# Allegro board solutionstida01606_powercard_29FEB.brd
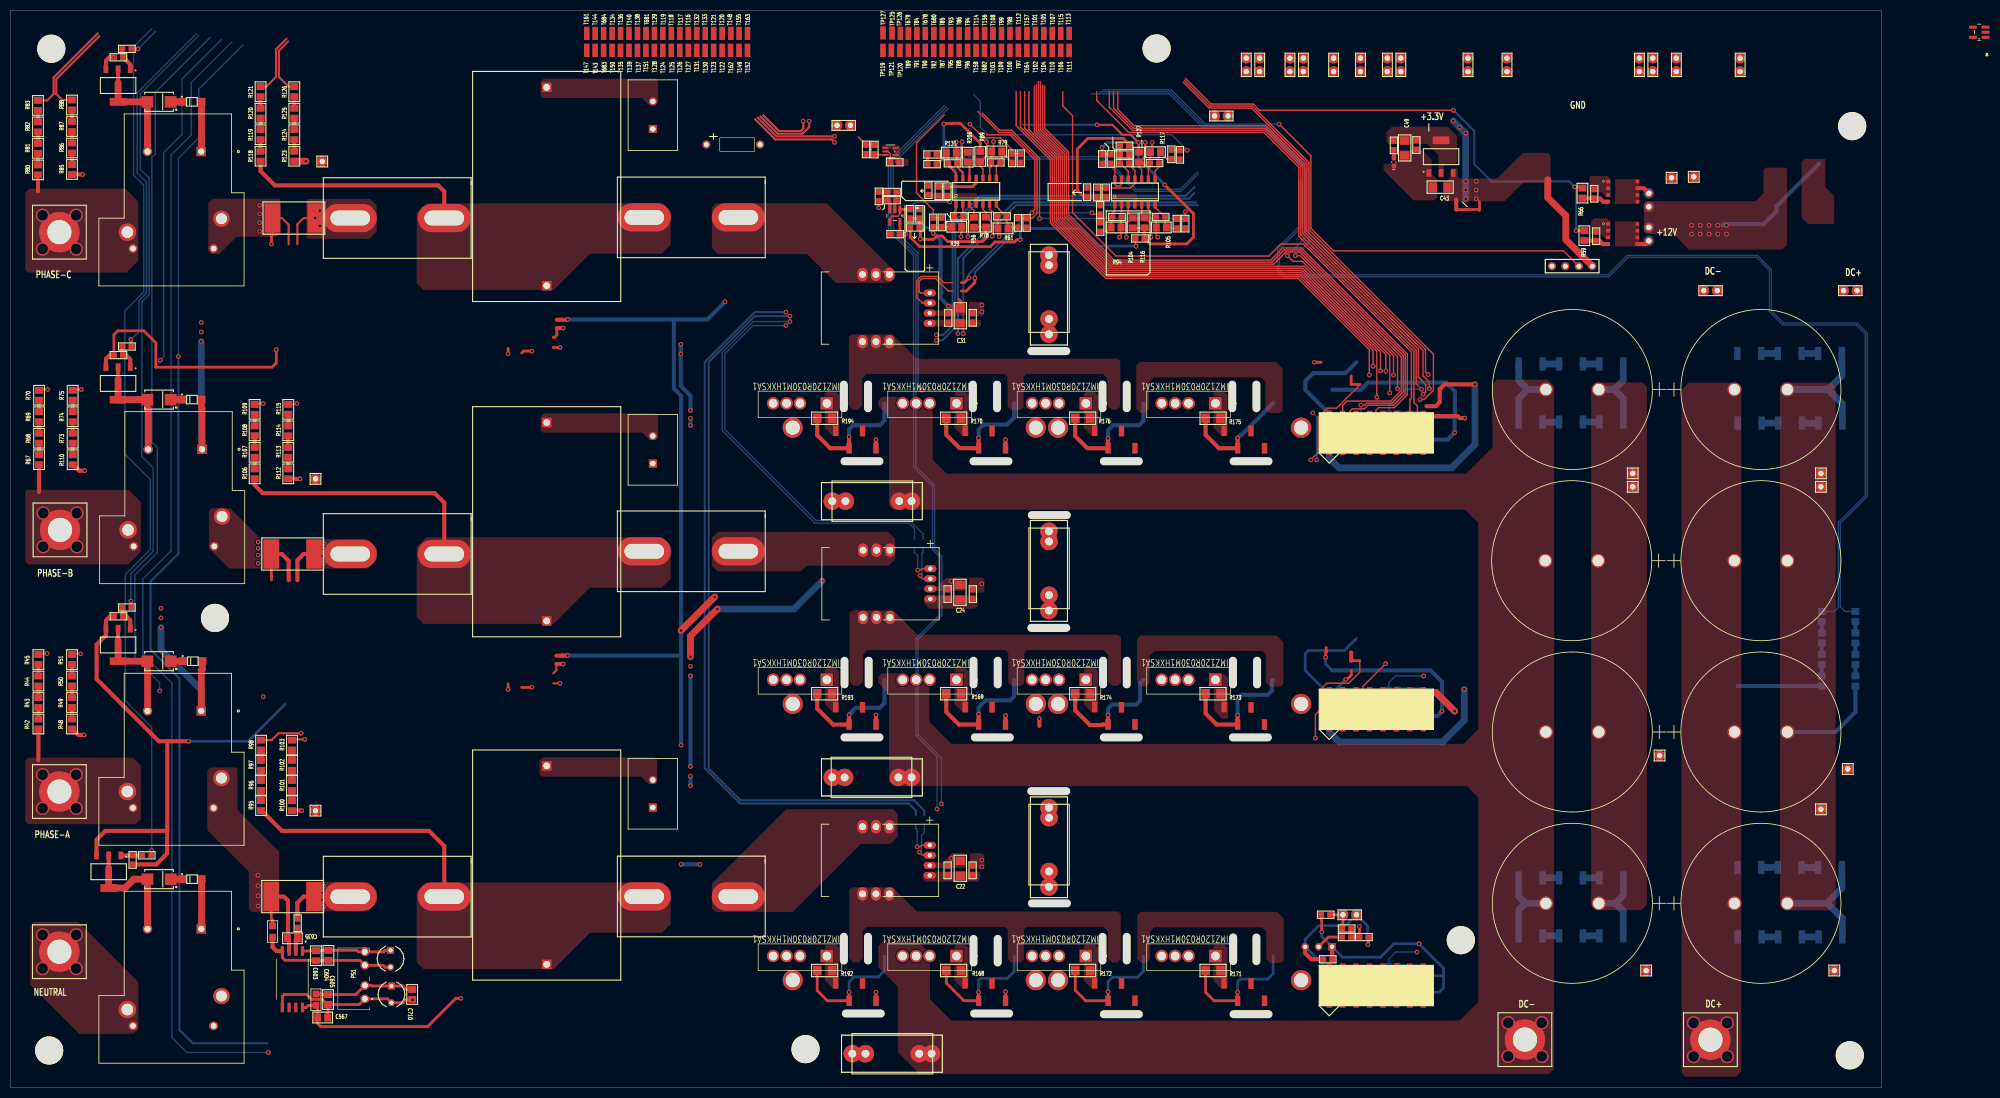
[diagram p0: board, top side]
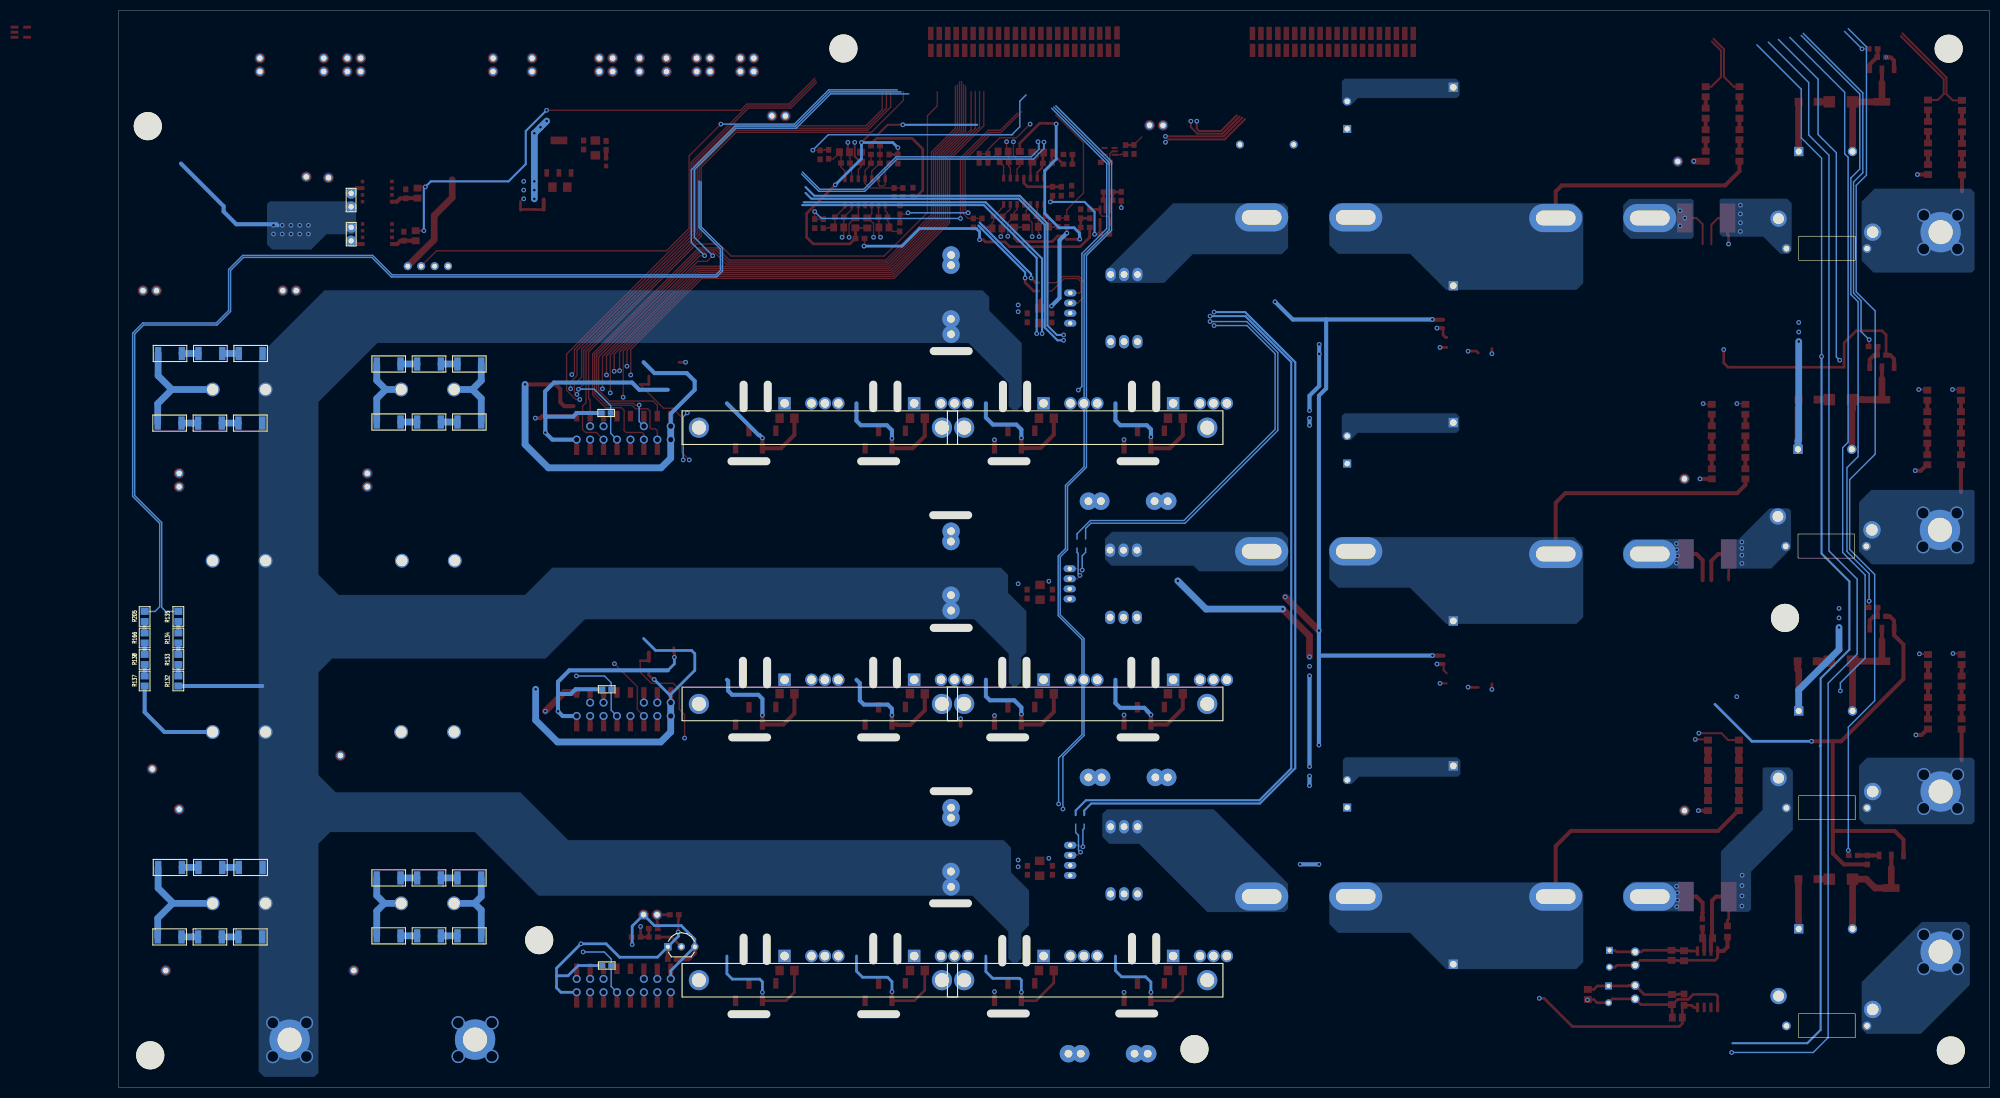
[diagram p1: board, bottom side, seen from below]

Outline 353.56 x 203.56 mm; copper layers: TOP, GND LAYER, PWR LAYER, BOTTOM. Coordinates in mm from the lower left corner of the outline.
Outline path: 157.48,132.84 157.48,128.4 ; 157.48,28.45 157.48,24 ; 157.61,118.36 164.21,118.36 ; 157.61,80.64 157.61,76.2 ; 157.61,66.17 164.21,66.17 ; 157.86,13.97 164.47,13.97 ; 162.05,132.84 162.05,128.4 ; 162.05,28.45 162.05,24 ; 162.18,80.64 162.18,76.2 ; 181.86,132.84 181.86,128.4 ; 181.99,118.36 188.59,118.36 ; 181.99,80.64 181.99,76.2 ; 181.99,28.07 181.99,23.62 ; 182.12,13.97 188.72,13.97 ; 182.25,66.17 188.85,66.17 ; 186.44,132.84 186.44,128.4 ; 186.56,80.64 186.56,76.2 ; 186.56,28.07 186.56,23.62 ; 192.91,139.19 199.52,139.19 ; 192.91,86.87 199.52,86.87 ; 192.91,56.01 199.52,56.01 ; 193.01,108.18 199.62,108.18 ; 193.04,34.8 199.64,34.8 ; 206.38,132.84 206.38,128.4 ; 206.38,28.45 206.38,24 ; 206.48,80.64 206.48,76.2 ; 206.63,118.36 213.23,118.36 ; 206.63,66.17 213.23,66.17 ; 206.63,13.84 213.23,13.84 ; 210.95,132.84 210.95,128.4 ; 210.95,80.64 210.95,76.2 ; 210.95,28.45 210.95,24 ; 215.85,194.16 215.95,194.06 ; 230.89,132.84 230.89,128.4 ; 231.01,80.64 231.01,76.2 ; 231.01,66.17 237.62,66.17 ; 231.06,28.35 231.06,23.9 ; 231.14,118.36 237.74,118.36 ; 231.14,13.84 237.74,13.84 ; 235.46,132.84 235.46,128.4 ; 235.46,28.32 235.46,23.88 ; 235.58,80.64 235.58,76.2 ; 0,203.56 353.56,203.56 353.56,0 0,0 0,203.56

## Design rules (mm)
constraint set DEFAULT: min track width 0.127

## Placement (name value [footprint] x y rotation side)
C1  0.15uF 630V TH  [BOXCAPACITOR15MM]  196.24 142.37 180 top
C2  0.15uF 630V TH  [BOXCAPACITOR15MM]  196.24 90.15 180 top
C3  0.15uF 630V TH  [BOXCAPACITOR15MM]  196.24 37.9 180 top
C4  Ele 120uF 600V TH  [CAP_B45_NCH]  325.81 131.93 0 top
C5  Ele 120uF 600V TH  [CAP_B45_NCH]  325.81 34.8 0 top
C6  Ele 120uF 600V TH  [CAP_B45_NCH]  300.17 34.8 180 top
C7  Ele 120uF 600V TH  [CAP_B45_NCH]  300.17 131.93 180 top
C8  10uF TH  [BOXCAP_37_5MM]  101.32 33.28 90 top
C9  10uF TH  [BOXCAP_37_5MM]  101.32 98.18 90 top
C10  10uF TH  [BOXCAP_37_5MM]  101.32 161.55 90 top
C11  0.15uF 630V TH  [BOXCAPACITOR15MM]  159.08 6.38 90 top
C12  0.15uF 630V TH  [BOXCAPACITOR15MM]  155.3 58.6 90 top
C13  0.15uF 630V TH  [BOXCAPACITOR15MM]  155.3 110.82 90 top
C22  10uF 1206 25V  [SNPD1206_MODIFIED]  179.5 41.42 90 top
C23  0.1uF 0603 25V  [RES0603]  177.09 41.03 90 top
C24  10uF 1206 25V  [SNPD1206_MODIFIED]  179.43 93.6 90 top
C25  0.1uF 0603 25V  [RES0603]  177.09 93.26 90 top
C31  10uF 1206 25V  [SNPD1206_MODIFIED]  179.5 145.87 90 top
C32  0.1uF 0603 25V  [RES0603]  177.22 145.45 90 top
C39  0.1uF 0603 25V  [RES0603]  255.76 28.42 180 top
C43  10u 1206 25V  [SNPD1206_MODIFIED]  270.18 170.18 180 top
C44  0.1u 0603 25V  [RES0603]  265.68 178.14 90 top
C47  0.1uF 0603 25V  [RES0603]  175.41 169.4 270 top
C49  10u 1206 25V  [SNPD1206_MODIFIED]  263.47 177.59 270 top
C51  0.1uF 0603 25V  [RES0603]  174.37 163.51 90 top
C52  0.1uF 0603 25V  [RES0603]  161.67 177.31 90 top
C53  0.1uF 0603 25V  [RES0603]  167.09 174.88 0 top
C54  0.1uF 0603 25V  [RES0603]  192.02 163.41 90 top
C55  0.1uF 0603 25V  [RES0603]  190.93 175.63 90 top
C56  1uF 0603 25V  [RES0603]  177.06 169.4 270 top
C57  0.1uF 0603 25V  [RES0603]  205.36 169.18 270 top
C58  1uF 0603 25V  [RES0603]  207.01 169.18 270 top
C59  0.1uF 0603 25V  [RES0603]  205.92 165.9 270 top
C60  0.1uF 0603 25V  [RES0603]  222.02 163.29 90 top
C63  0.1uF 0603 25V  [RES0603]  221.01 176.29 90 top
C69  0.1uF 0603 25V  [RES0603]  210.53 174.7 180 top
C70  0.1uF 0603 25V  [RES0603]  206.3 175.5 90 top
C71  0.1uF 0603 25V  [RES0603]  166.57 167.72 180 top
C72  0.1uF 0603 25V  [RES0603]  171.74 165.15 270 top
C73  Ele 120uF 600V TH  [CAP_B45_NCH]  325.81 99.57 0 top
C74  Ele 120uF 600V TH  [CAP_B45_NCH]  325.81 67.18 0 top
C75  Ele 120uF 600V TH  [CAP_B45_NCH]  300.17 67.18 180 top
C76  Ele 120uF 600V TH  [CAP_B45_NCH]  300.04 99.57 180 top
C83  100pF 0603 50V  [RES0603]  179.21 164.67 180 top
C84  100pF 0603 50V  [RES0603]  209.11 164.54 180 top
C85  100pF 0603 50V  [RES0603]  187.36 164.67 0 top
C86  100pF 0603 50V  [RES0603]  217.36 164.54 0 top
C87  100pF 0603 50V  [RES0603]  186.19 174.85 0 top
C88  100pF 0603 50V  [RES0603]  216.19 174.73 0 top
C90  0.1uF 0603 25V  [RES0603]  248.93 24.23 180 top
C120  0.068uF 630V TH  [BOXCAPACITOR10MM]  196.27 145.26 180 top
C121  0.068uF 630V TH  [BOXCAPACITOR10MM]  196.27 93.04 180 top
C122  0.068uF 630V TH  [BOXCAPACITOR10MM]  196.27 40.82 180 top
C127  0.068uF 630V TH  [BOXCAPACITOR10MM]  157.78 110.82 90 top
C128  0.068uF 630V TH  [BOXCAPACITOR10MM]  161.57 6.38 90 top
C129  0.068uF 630V TH  [BOXCAPACITOR10MM]  157.63 58.6 90 top
C130  2200PF 3KV 20%  [CAP400]  131.5 178.23 270 top
C133  100pF 0603 50V  [RES0603]  178.03 174.68 180 top
C134  0.1uF 0603 25V  [RES0603]  174.17 176.35 180 top
C135  0.1uF 0603 25V  [RES0603]  167.18 161.29 180 top
C567  0.1u 0805 50V  [SNPD0805_MODIFIED]  58.98 13.21 0 top
C603  0.1u 0805 50V  [SNPD0805_MODIFIED]  57.71 24.89 270 top
C604  1u 0805 50V  [SNPD0805_MODIFIED]  60.07 24.97 270 top
C605  0.1u 0805 50V  [SNPD0805_MODIFIED]  60 16.61 270 top
C629  47uF 25V  [CYLD200LS125031]  71.81 25.91 270 top
C632  47uF 25V  [CYLD200LS125031]  71.99 19.18 270 top
C635  100p 0805 25V  [SNPD0805_MODIFIED]  53.27 28.19 180 top
C710  1u 0805 50V  [SNPD0805_MODIFIED]  75.9 17.58 270 top
D1  BZV55C15-TP 15V  [DO214_REV3]  34.44 80.57 0 top
D2  BZV55C15-TP 15V  [DO214_REV3]  34.27 130.02 0 top
D3  B160-13-F  [DO214AB]  28.06 80.57 180 top
D4  BZV55C15-TP 15V  [DO214_REV3]  34.27 186.31 0 top
D5  BZV55C15-TP 15V  [DO214_REV3]  34.29 39.37 0 top
D6  B160-13-F  [DO214AB]  28.06 130.02 180 top
D7  B160-13-F  [DO214AB]  28.06 186.31 180 top
D8  B160-13-F  [DO214AB]  28.07 39.37 180 top
D19  LED GREEN 150060VS55040  [LED0603]  261.44 174.92 90 top
J1  CON2  [CONN_HIGHAMP_REV1]  321.26 11.56 0 top
J2  CON2  [CONN_HIGHAMP_REV1]  286.21 11.58 0 top
J3  CON2  [CONN_HIGHAMP_REV1]  9.22 58.47 0 top
J4  CON2  [CONN_HIGHAMP_REV1]  9.35 107.93 0 top
J7  NPTC041KFXC-RC  [NPTC041KFXC-RC_4PIN]  230.63 18.36 0 top
J8  CON2  [SIP_2PIN_BERGSTRIP]  230.1 183.64 270 top
J9  NPTC041KFXC-RC  [NPTC041KFXC-RC_4PIN]  157.2 70.59 0 top
J12  NPTC041KFXC-RC  [NPTC041KFXC-RC_4PIN]  157.2 122.81 0 top
J14  NPTC041KFXC-RC  [NPTC041KFXC-RC_4PIN]  206.15 18.36 0 top
J15  NPTC041KFXC-RC  [NPTC041KFXC-RC_4PIN]  181.69 70.59 0 top
J16  NPTC041KFXC-RC  [NPTC041KFXC-RC_4PIN]  181.69 122.81 0 top
J17  NPTC041KFXC-RC  [NPTC041KFXC-RC_4PIN]  181.69 18.36 0 top
J18  NPTC041KFXC-RC  [NPTC041KFXC-RC_4PIN]  206.15 70.59 0 top
J19  NPTC041KFXC-RC  [NPTC041KFXC-RC_4PIN]  206.15 122.81 0 top
J20  NPTC041KFXC-RC  [NPTC041KFXC-RC_4PIN]  157.2 18.36 0 top
J21  NPTC041KFXC-RC  [NPTC041KFXC-RC_4PIN]  230.63 70.59 0 top
J22  NPTC041KFXC-RC  [NPTC041KFXC-RC_4PIN]  230.63 122.81 0 top
J23  -  [NPTC082KFMS-RC]  249.22 17.98 0 top
J24  -  [NPTC082KFMS-RC]  249.22 70.21 0 top
J25  -  [NPTC082KFMS-RC]  249.22 122.45 0 top
J26  61300211121  [SIP_2PIN_BERGSTRIP#2]  309.63 162.56 180 bottom
J27  CON2  [SIP_2PIN_BERGSTRIP]  254.36 32.64 270 top
J28  61300211121  [SIP_2PIN_BERGSTRIP#2]  309.63 166.47 0 bottom
J31  CON2  [CONN_HIGHAMP_REV1]  9.22 164.21 0 top
J32  CON2  [CONN_HIGHAMP_REV1]  9.22 28.19 0 top
J35  CON2  [SIP_2PIN_BERGSTRIP]  322.55 150.62 270 top
J36  CON2  [SIP_2PIN_BERGSTRIP]  348.97 150.62 270 top
J37  CON2  [SIP_2PIN_BERGSTRIP]  158.72 181.86 270 top
J38  PPTC041LFBN-RC  [JUMPER4MODIFIED]  298.93 155.25 180 top
J61  CON2  [SIP_2PIN_BERGSTRIP]  314.81 194.56 0 top
J62  CON2  [SIP_2PIN_BERGSTRIP]  255.12 194.56 0 top
J63  CON2  [SIP_2PIN_BERGSTRIP]  250.04 194.56 0 top
J64  CON2  [SIP_2PIN_BERGSTRIP]  260.2 194.56 0 top
J65  CON2  [SIP_2PIN_BERGSTRIP]  262.74 194.56 0 top
J66  CON2  [SIP_2PIN_BERGSTRIP]  307.82 194.56 0 top
J69  CON2  [SIP_2PIN_BERGSTRIP]  236.07 194.56 0 top
J73  CON2  [SIP_2PIN_BERGSTRIP]  241.78 194.56 0 top
J87  CON2  [SIP_2PIN_BERGSTRIP]  326.87 194.56 0 top
J88  CON2  [SIP_2PIN_BERGSTRIP]  233.53 194.56 0 top
J100  CON2  [SIP_2PIN_BERGSTRIP]  244.32 194.56 0 top
J182  Iso_Opamp_AMC1302 SOIC8_DWV  [SOIC127P1150X280-8N]  53.27 20.45 270 top
J612  CON2  [SIP_2PIN_BERGSTRIP]  310.36 194.56 0 top
J*  -  [unnamed#2]  243.91 20.27 180 bottom
J*#2  -  [unnamed#2]  243.91 124.71 180 bottom
J*#3  -  [unnamed#2]  193.77 124.71 180 bottom
J*#4  -  [unnamed#2]  193.77 20.27 180 bottom
J*#5  -  [unnamed#2]  243.91 72.49 180 bottom
J*#6  -  [unnamed#2]  193.77 72.49 180 bottom
K1  T9AS1D12-15  [RELAY_T9AS1D12-15_REV1]  36.04 71.17 180 top
K2  T9AS1D12-15  [RELAY_T9AS1D12-15_REV1]  36.17 120.63 180 top
K3  T9AS1D12-15  [RELAY_T9AS1D12-15_REV1]  36.04 176.91 180 top
K4  T9AS1D12-15  [RELAY_T9AS1D12-15_REV1]  36.04 29.97 180 top
L1  340uH  [CONN2_HIGHAMP]  124.84 36.09 180 top
L2  0.006E 15A  [CONN2_HIGHAMP]  69.27 36.07 180 top
L3  340uH  [CONN2_HIGHAMP]  124.84 101.35 180 top
L4  0.006E 15A  [CONN2_HIGHAMP]  69.27 100.84 180 top
L5  340uH  [CONN2_HIGHAMP]  124.84 164.47 180 top
L6  0.006E 15A  [CONN2_HIGHAMP]  69.27 164.34 180 top
L9  74279228260  [RES0603]  181.81 41.03 270 top
L10  74279228260  [RES0603]  181.86 93.26 270 top
L14  74279228260  [RES0603]  181.84 145.48 270 top
L21  74279228260  [RES0603]  173.46 169.61 270 top
L23  74279228260  [RES0603]  203.45 169.23 270 top
L25  10E 0805  [SMR0805]  57.71 15.52 90 top
L40  10E 0805  [SMR0805]  49.51 30.53 270 top
NOREF  -  [unnamed]  38.63 88.75 0 top
NOREF#2  -  [unnamed]  347.6 6.07 0 top
NOREF#3  -  [unnamed]  150.24 7.24 0 top
NOREF#4  -  [unnamed]  216.59 196.39 0 top
NOREF#5  -  [unnamed]  274.09 27.84 0 top
NOREF#6  -  [unnamed]  348.06 181.71 0 top
NOREF#7  -  [unnamed]  7.29 6.99 0 top
NOREF#8  -  [unnamed]  7.7 196.34 0 top
PS1  B0505S-1WR3  [B0505S1WR_REV1]  66.96 16.74 90 top
Q1  IMZ120R030M1HXKSA1  [TO254P1580X500X2522-4]  178.77 24.84 180 top
Q2  IMZ120R030M1HXKSA1  [TO254P1580X500X2522-4]  154.28 24.84 180 top
Q3  IMZ120R030M1HXKSA1  [TO254P1580X500X2522-4]  203.23 24.84 180 top
Q4  IMZ120R030M1HXKSA1  [TO254P1580X500X2522-4]  227.71 24.84 180 top
Q5  IMZ120R030M1HXKSA1  [TO254P1580X500X2522-4]  178.77 77.06 180 top
Q6  IMZ120R030M1HXKSA1  [TO254P1580X500X2522-4]  154.28 77.06 180 top
Q7  IMZ120R030M1HXKSA1  [TO254P1580X500X2522-4]  203.23 77.06 180 top
Q8  IMZ120R030M1HXKSA1  [TO254P1580X500X2522-4]  227.71 77.06 180 top
Q9  IMZ120R030M1HXKSA1  [TO254P1580X500X2522-4]  178.77 129.31 180 top
Q10  IMZ120R030M1HXKSA1  [TO254P1580X500X2522-4]  154.28 129.31 180 top
Q11  IMZ120R030M1HXKSA1  [TO254P1580X500X2522-4]  203.23 129.31 180 top
Q12  IMZ120R030M1HXKSA1  [TO254P1580X500X2522-4]  227.71 129.31 180 top
Q13  CSD18534Q5A  [TRANS_CSD18534Q5A]  304.67 161.32 0 top
Q14  CSD18534Q5A  [TRANS_CSD18534Q5A]  304.7 169.34 0 top
Q15  NDT3055L  [SOT223_4]  20.32 83.64 270 top
Q16  NDT3055L  [SOT223_4]  20.32 133.07 270 top
Q17  NDT3055L  [SOT223_4]  20.32 189.38 270 top
Q18  NDT3055L  [SOT223_4]  18.54 40.77 270 top
R1  510K 2010 5%  [RES2010N]  328.62 138.74 180 bottom
R2  510K 2010 5%  [RES2010N]  328.69 125.58 180 bottom
R3  510K 2010 5%  [RES2010N]  336.24 138.74 180 bottom
R4  510K 2010 5%  [RES2010N]  336.31 125.58 180 bottom
R5  0.001E 1052 1%  [RES_PSR400IT]  53.31 36.07 0 top
R6  510K 2010 5%  [RES2010N]  343.86 138.74 180 bottom
R7  510K 2010 5%  [RES2010N]  343.93 125.58 180 bottom
R8  10K 0603 1%  [RES0603]  261.33 75.26 0 bottom
R9  510K 2010 5%  [RES2010N]  302.53 125.78 0 bottom
R10  510K 2010 5%  [RES2010N]  302.53 136.75 0 bottom
R11  10K 0603 1%  [RES0603]  261.43 127.48 0 bottom
R12  510K 2010 5%  [RES2010N]  294.91 125.78 0 bottom
R13  510K 2010 5%  [RES2010N]  294.91 136.75 0 bottom
R14  510K 2010 5%  [RES2010N]  287.29 125.78 0 bottom
R15  510K 2010 5%  [RES2010N]  287.29 136.75 0 bottom
R16  0.68E 5% TH  [RES_SQM7_TYCO]  121.39 52.91 90 top
R17  0.68E 5% TH  [RES_SQM7_TYCO]  121.39 117.93 90 top
R18  0.68E 5% TH  [RES_SQM7_TYCO]  121.39 181.18 90 top
R32  10K 0603 1%  [RES0603]  261.33 23.04 0 bottom
R39  11K 0805 0.1%  [SNPD0805_MODIFIED]  178.8 162.69 0 top
R41  0.001E 1052 1%  [RES_PSR400IT]  53.31 100.84 0 top
R42  1M 0805 0.1%  [SNPD0805_MODIFIED]  5.26 68.69 270 top
R43  1M 0805 0.1%  [SNPD0805_MODIFIED]  5.26 72.76 270 top
R44  1M 0805 0.1%  [SNPD0805_MODIFIED]  5.26 76.82 270 top
R45  1K 0805 0.1%  [SNPD0805_MODIFIED]  5.26 80.88 270 top
R46  68.1E 0603 1%  [RES0603]  176 163.51 270 top
R47  0.001E 1052 1%  [RES_PSR400IT]  53.54 164.34 0 top
R48  1M 0805 0.1%  [SNPD0805_MODIFIED]  11.61 68.69 270 top
R49  1M 0805 0.1%  [SNPD0805_MODIFIED]  11.61 72.76 270 top
R50  1M 0805 0.1%  [SNPD0805_MODIFIED]  11.61 76.82 270 top
R51  1K 0805 0.1%  [SNPD0805_MODIFIED]  11.61 80.88 270 top
R52  10K 0603 1%  [RES0603]  252.51 28.42 180 top
R55  10K 0603 1%  [RES0603]  248.55 32.64 0 top
R56  11K 0805 0.1%  [SNPD0805_MODIFIED]  182.07 163.54 270 top
R58  10K 0603 1%  [RES0603]  252.51 30.05 180 top
R59  200E 0805 1%  [SNPD0805_MODIFIED]  297.43 161 270 top
R60  10K 0603 1%  [RES0603]  299.67 160.9 90 top
R61  11K 0805 1%  [SNPD0805_MODIFIED]  187.56 162.38 180 top
R66  200E 0805 1%  [SNPD0805_MODIFIED]  297.08 169.05 270 top
R67  1M 0805 0.1%  [SNPD0805_MODIFIED]  5.38 118.65 270 top
R68  1M 0805 0.1%  [SNPD0805_MODIFIED]  5.38 122.72 270 top
R69  1M 0805 0.1%  [SNPD0805_MODIFIED]  5.38 126.78 270 top
R70  1K 0805 0.1%  [SNPD0805_MODIFIED]  5.38 130.85 270 top
R71  68.1E 0603 1%  [RES0603]  190.4 163.41 270 top
R73  1M 0805 0.1%  [SNPD0805_MODIFIED]  11.73 122.72 270 top
R74  1M 0805 0.1%  [SNPD0805_MODIFIED]  11.73 126.78 270 top
R75  1K 0805 0.1%  [SNPD0805_MODIFIED]  11.73 130.85 270 top
R76  10K 0603 1%  [RES0603]  299.31 168.92 90 top
R78  11K 0805 0.1%  [SNPD0805_MODIFIED]  184.33 163.57 270 top
R79  11K 0805 0.1%  [SNPD0805_MODIFIED]  186.4 176.91 180 top
R80  1M 0805 0.1%  [SNPD0805_MODIFIED]  5.18 173.44 270 top
R81  1M 0805 0.1%  [SNPD0805_MODIFIED]  5.18 177.51 270 top
R82  1M 0805 0.1%  [SNPD0805_MODIFIED]  5.18 181.57 270 top
R83  1K 0805 0.1%  [SNPD0805_MODIFIED]  5.18 185.63 270 top
R84  68.1E 0603 1%  [RES0603]  189.28 175.63 270 top
R85  1M 0805 0.1%  [SNPD0805_MODIFIED]  11.61 173.52 270 top
R86  1M 0805 0.1%  [SNPD0805_MODIFIED]  11.61 177.58 270 top
R87  1M 0805 0.1%  [SNPD0805_MODIFIED]  11.61 181.65 270 top
R88  1K 0805 0.1%  [SNPD0805_MODIFIED]  11.61 185.71 270 top
R89  11K 0805 0.1%  [SNPD0805_MODIFIED]  183.26 175.98 90 top
R93  10K 0603 1%  [RES0603]  163.27 177.28 270 top
R94  11K 0805 0.1%  [SNPD0805_MODIFIED]  208.93 162.56 0 top
R95  1M 0805 0.1%  [SNPD0805_MODIFIED]  47.35 53.27 270 top
R96  1M 0805 0.1%  [SNPD0805_MODIFIED]  47.35 57.08 270 top
R97  1M 0805 0.1%  [SNPD0805_MODIFIED]  47.35 60.89 270 top
R98  1K 0805 0.1%  [SNPD0805_MODIFIED]  47.35 64.7 270 top
R99  68.1E 0603 1%  [RES0603]  205.94 162.65 270 top
R100  1M 0805 0.1%  [SNPD0805_MODIFIED]  53.19 53.27 270 top
R101  1M 0805 0.1%  [SNPD0805_MODIFIED]  53.19 57.08 270 top
R102  1M 0805 0.1%  [SNPD0805_MODIFIED]  53.19 60.89 270 top
R103  1K 0805 0.1%  [SNPD0805_MODIFIED]  53.19 64.7 270 top
R104  11K 0805 0.1%  [SNPD0805_MODIFIED]  212.06 163.41 270 top
R105  11K 0805 0.1%  [SNPD0805_MODIFIED]  217.49 162.56 180 top
R106  1M 0805 0.1%  [SNPD0805_MODIFIED]  46.13 115.99 270 top
R107  1M 0805 0.1%  [SNPD0805_MODIFIED]  46.13 120.05 270 top
R108  1M 0805 0.1%  [SNPD0805_MODIFIED]  46.13 124.12 270 top
R109  1K 0805 0.1%  [SNPD0805_MODIFIED]  46.13 128.18 270 top
R110  1M 0805 0.1%  [SNPD0805_MODIFIED]  11.73 118.65 270 top
R111  68.1E 0603 1%  [RES0603]  220.4 163.29 270 top
R112  1M 0805 0.1%  [SNPD0805_MODIFIED]  52.48 115.99 270 top
R113  1M 0805 0.1%  [SNPD0805_MODIFIED]  52.48 120.05 270 top
R114  1M 0805 0.1%  [SNPD0805_MODIFIED]  52.48 124.12 270 top
R115  1K 0805 0.1%  [SNPD0805_MODIFIED]  52.48 128.18 270 top
R116  11K 0805 0.1%  [SNPD0805_MODIFIED]  214.33 163.44 270 top
R117  11K 0805 0.1%  [SNPD0805_MODIFIED]  216.39 176.78 180 top
R118  1M 0805 0.1%  [SNPD0805_MODIFIED]  47.24 176.03 270 top
R119  1M 0805 0.1%  [SNPD0805_MODIFIED]  47.24 180.1 270 top
R120  1M 0805 0.1%  [SNPD0805_MODIFIED]  47.24 184.16 270 top
R121  1K 0805 0.1%  [SNPD0805_MODIFIED]  47.24 188.22 270 top
R122  68.1E 0603 1%  [RES0603]  219.38 176.39 270 top
R123  1M 0805 0.1%  [SNPD0805_MODIFIED]  53.62 176.03 270 top
R124  1M 0805 0.1%  [SNPD0805_MODIFIED]  53.62 180.1 270 top
R125  1M 0805 0.1%  [SNPD0805_MODIFIED]  53.62 184.16 270 top
R126  1K 0805 0.1%  [SNPD0805_MODIFIED]  53.62 188.22 270 top
R127  11K 0805 0.1%  [SNPD0805_MODIFIED]  213.26 175.85 90 top
R131  11K 0805 0.1%  [SNPD0805_MODIFIED]  177.8 176.71 0 top
R132  1M 0805 0.1%  [SNPD0805_MODIFIED]  342.29 76.83 270 bottom
R133  1M 0805 0.1%  [SNPD0805_MODIFIED]  342.29 80.9 270 bottom
R134  1M 0805 0.1%  [SNPD0805_MODIFIED]  342.29 84.96 270 bottom
R135  1K 0805 0.1%  [SNPD0805_MODIFIED]  342.29 89.02 270 bottom
R136  68.1E 0603 1%  [RES0603]  174.17 174.52 0 top
R137  1M 0805 0.1%  [SNPD0805_MODIFIED]  348.65 76.83 270 bottom
R138  1M 0805 0.1%  [SNPD0805_MODIFIED]  348.65 80.9 270 bottom
R139  10K 0603 0.1%  [RES0603]  210.53 178 180 top
R140  10E 0603 5%  [RES0603]  207.95 175.5 270 top
R141  10K 0603 0.1%  [RES0603]  210.53 176.35 0 top
R142  10K 0603 0.1%  [RES0603]  164.08 168.44 90 top
R143  10E 0603 5%  [RES0603]  170.02 165.15 90 top
R144  10K 0603 0.1%  [RES0603]  166.57 169.27 0 top
R166  1M 0805 0.1%  [SNPD0805_MODIFIED]  348.65 84.96 270 bottom
R168  10K 1206 5%  [SNPD1206_MODIFIED]  178.23 22.1 0 top
R169  10K 1206 5%  [SNPD1206_MODIFIED]  178.23 74.42 0 top
R170  10K 1206 5%  [SNPD1206_MODIFIED]  178.23 126.49 0 top
R171  10K 1206 5%  [SNPD1206_MODIFIED]  227.26 22.1 180 top
R172  10K 1206 5%  [SNPD1206_MODIFIED]  202.62 22.1 180 top
R173  10K 1206 5%  [SNPD1206_MODIFIED]  227.26 74.42 180 top
R174  10K 1206 5%  [SNPD1206_MODIFIED]  202.62 74.42 180 top
R175  10K 1206 5%  [SNPD1206_MODIFIED]  227.26 126.49 180 top
R176  10K 1206 5%  [SNPD1206_MODIFIED]  202.62 126.49 180 top
R178  10E 0603 5%  [RES0603]  213.45 160.48 180 top
R179  10E 0603 5%  [RES0603]  170.89 162.56 180 top
R180  510K 2010 5%  [RES2010N]  328.62 41.58 180 bottom
R181  510K 2010 5%  [RES2010N]  328.69 28.45 180 bottom
R182  510K 2010 5%  [RES2010N]  336.24 41.58 180 bottom
R183  510K 2010 5%  [RES2010N]  336.31 28.45 180 bottom
R184  510K 2010 5%  [RES2010N]  343.86 41.58 180 bottom
R185  510K 2010 5%  [RES2010N]  343.93 28.45 180 bottom
R186  510K 2010 5%  [RES2010N]  302.53 39.6 0 bottom
R187  510K 2010 5%  [RES2010N]  302.53 28.65 0 bottom
R188  510K 2010 5%  [RES2010N]  294.91 39.6 0 bottom
R189  510K 2010 5%  [RES2010N]  294.91 28.65 0 bottom
R190  510K 2010 5%  [RES2010N]  287.29 39.6 0 bottom
R191  510K 2010 5%  [RES2010N]  287.29 28.65 0 bottom
R192  0E 1206 1%  [SNPD1206_MODIFIED]  153.85 22.1 0 top
R193  0E 1206 1%  [SNPD1206_MODIFIED]  153.85 74.42 0 top
R194  0E 1206 1%  [SNPD1206_MODIFIED]  153.85 126.49 0 top
R197  100E 0603 5%  [RES0603]  21.98 90.73 0 top
R198  100E 0603 5%  [RES0603]  21.98 140.06 0 top
R199  100E 0603 5%  [RES0603]  21.98 196.32 0 top
R200  100E 0603 5%  [RES0603]  25.73 43.87 0 top
R201  2K 0603 5%  [RES0603]  20.38 89.05 0 top
R202  2K 0603 5%  [RES0603]  20.38 194.72 0 top
R203  2K 0603 5%  [RES0603]  23.06 43 90 top
R204  2K 0603 5%  [RES0603]  20.38 138.43 0 top
R205  1K 0805 0.1%  [SNPD0805_MODIFIED]  348.65 89.02 270 bottom
R206  11K 0805 0.1%  [SNPD0805_MODIFIED]  180.9 175.84 90 top
R208  820E 0603 1%  [RES0603]  261.44 178.07 90 top
R793  105E 0603 1%  [RES0603]  54.26 31.04 90 top
RF1  47  [FUSE600]  38.37 52.83 270 bottom
RF2  47  [FUSE600]  38.5 102.29 270 bottom
RF3  47  [FUSE600]  38.37 158.57 270 bottom
RF4  47  [FUSE600]  38.37 11.63 270 bottom
T84  T  [PINCONTROLCARD]  171.28 199.24 90 top
T85  T  [PINCONTROLCARD]  176.08 199.24 90 top
T86  T  [PINCONTROLCARD]  179.28 199.24 90 top
T87  T  [PINCONTROLCARD]  176.07 196.04 90 top
T88  T  [PINCONTROLCARD]  179.27 196.04 90 top
T89  T  [PINCONTROLCARD]  169.67 196.04 90 top
T90  T  [PINCONTROLCARD]  172.87 196.04 90 top
T91  T  [PINCONTROLCARD]  171.27 196.04 90 top
T92  T  [PINCONTROLCARD]  174.47 196.04 90 top
T93  T  [PINCONTROLCARD]  177.68 199.24 90 top
T94  T  [PINCONTROLCARD]  180.88 199.24 90 top
T95  T  [PINCONTROLCARD]  177.67 196.04 90 top
T96  T  [PINCONTROLCARD]  180.87 196.04 90 top
T97  T  [PINCONTROLCARD]  190.47 196.04 90 top
T98  T  [PINCONTROLCARD]  188.88 199.24 90 top
T99  T  [PINCONTROLCARD]  187.28 199.24 90 top
T100  T  [PINCONTROLCARD]  188.87 196.04 90 top
T101  T  [PINCONTROLCARD]  193.68 199.24 90 top
T102  T  [PINCONTROLCARD]  193.67 196.04 90 top
T103  T  [PINCONTROLCARD]  185.67 196.04 90 top
T104  T  [PINCONTROLCARD]  195.27 196.04 90 top
T105  T  [PINCONTROLCARD]  195.28 199.24 90 top
T106  T  [PINCONTROLCARD]  198.47 196.04 90 top
T107  T  [PINCONTROLCARD]  196.88 199.24 90 top
T108  T  [PINCONTROLCARD]  185.68 199.24 90 top
T109  T  [PINCONTROLCARD]  187.27 196.04 90 top
T110  T  [PINCONTROLCARD]  196.87 196.04 90 top
T111  T  [PINCONTROLCARD]  200.07 196.04 90 top
T112  T  [PINCONTROLCARD]  190.48 199.24 90 top
T113  T  [PINCONTROLCARD]  200.08 199.24 90 top
T114  T  [PINCONTROLCARD]  182.48 199.24 90 top
T115  T  [PINCONTROLCARD]  198.48 199.24 90 top
T116  T  [PINCONTROLCARD]  128.09 199.24 90 top
T117  T  [PINCONTROLCARD]  126.49 199.24 90 top
T118  T  [PINCONTROLCARD]  124.89 199.24 90 top
T119  T  [PINCONTROLCARD]  123.29 199.24 90 top
T120  T  [PINCONTROLCARD]  134.48 199.24 90 top
T121  T  [PINCONTROLCARD]  132.89 199.24 90 top
T122  T  [PINCONTROLCARD]  134.47 196.04 90 top
T123  T  [PINCONTROLCARD]  132.87 196.04 90 top
T124  T  [PINCONTROLCARD]  123.28 196.04 90 top
T125  T  [PINCONTROLCARD]  124.88 196.04 90 top
T126  T  [PINCONTROLCARD]  126.48 196.04 90 top
T127  T  [PINCONTROLCARD]  128.08 196.04 90 top
T128  T  [PINCONTROLCARD]  121.68 196.04 90 top
T129  T  [PINCONTROLCARD]  121.69 199.24 90 top
T130  T  [PINCONTROLCARD]  131.27 196.04 90 top
T131  T  [PINCONTROLCARD]  129.68 196.04 90 top
T132  T  [PINCONTROLCARD]  129.69 199.24 90 top
T133  T  [PINCONTROLCARD]  131.29 199.24 90 top
T134  T  [PINCONTROLCARD]  113.69 199.24 90 top
T135  T  [PINCONTROLCARD]  115.28 196.04 90 top
T136  T  [PINCONTROLCARD]  115.29 199.24 90 top
T137  T  [PINCONTROLCARD]  118.48 196.04 90 top
T138  T  [PINCONTROLCARD]  118.49 199.24 90 top
T139  T  [PINCONTROLCARD]  116.88 196.04 90 top
T140  T  [PINCONTROLCARD]  116.89 199.24 90 top
T143  T  [PINCONTROLCARD]  110.48 196.04 90 top
T144  T  [PINCONTROLCARD]  110.49 199.24 90 top
T147  T  [PINCONTROLCARD]  108.89 196.04 90 top
T148  T  [PINCONTROLCARD]  136.14 199.24 90 top
T149  T  [PINCONTROLCARD]  137.67 196.04 90 top
T150  T  [PINCONTROLCARD]  113.68 196.04 90 top
T151  T  [PINCONTROLCARD]  120.08 196.04 90 top
T152  T  [PINCONTROLCARD]  139.27 196.04 90 top
T155  T  [PINCONTROLCARD]  137.68 199.24 90 top
T156  T  [PINCONTROLCARD]  184.08 199.24 90 top
T157  T  [PINCONTROLCARD]  192.08 199.24 90 top
T158  T  [PINCONTROLCARD]  182.47 196.04 90 top
T161  T  [PINCONTROLCARD]  108.89 199.24 90 top
T162  T  [PINCONTROLCARD]  136.07 196.04 90 top
T163  T  [PINCONTROLCARD]  139.28 199.24 90 top
T164  T  [PINCONTROLCARD]  192.07 196.04 90 top
T678  T  [PINCONTROLCARD]  172.88 199.24 90 top
T679  T  [PINCONTROLCARD]  169.68 199.24 90 top
T680  T  [PINCONTROLCARD]  174.48 199.24 90 top
T681  T  [PINCONTROLCARD]  120.09 199.24 90 top
T682  T  [PINCONTROLCARD]  184.07 196.04 90 top
T683  T  [PINCONTROLCARD]  112.08 196.04 90 top
T684  T  [PINCONTROLCARD]  112.09 199.24 90 top
TP2  TEST POINT  [TESTPOINT]  318.11 172.14 0 top
TP3  TEST POINT  [TESTPOINT]  313.92 171.96 0 top
TP4  TEST POINT  [TESTPOINT]  309.12 22.1 0 top
TP5  TEST POINT  [TESTPOINT]  344.68 22.1 0 top
TP6  TEST POINT  [TESTPOINT]  311.66 62.74 0 top
TP7  TEST POINT  [TESTPOINT]  342.14 52.58 0 top
TP8  TEST POINT  [TESTPOINT]  347.22 60.2 0 top
TP9  TEST POINT  [TESTPOINT]  306.58 116.08 0 top
TP10  TEST POINT  [TESTPOINT]  306.58 113.54 0 top
TP11  TEST POINT  [TESTPOINT]  342.14 116.08 0 top
TP12  TEST POINT  [TESTPOINT]  342.14 113.54 0 top
TP13  TEST POINT  [TESTPOINT]  57.63 52.32 0 top
TP14  TEST POINT  [TESTPOINT]  57.63 115.04 0 top
TP15  TEST POINT  [TESTPOINT]  58.9 175.03 0 top
TP119  TP  [PINCONTROLCARD]  164.87 196.04 90 top
TP120  TP  [PINCONTROLCARD]  168.07 196.04 90 top
TP121  TP  [PINCONTROLCARD]  166.47 196.04 90 top
TP125  TP  [PINCONTROLCARD]  166.59 199.31 90 top
TP126  TP  [PINCONTROLCARD]  168.16 199.26 90 top
TP127  TP  [PINCONTROLCARD]  164.88 199.34 90 top
TP145  CON2  [SIP_2PIN_BERGSTRIP]  275.44 194.56 0 top
TP146  CON2  [SIP_2PIN_BERGSTRIP]  282.81 194.56 0 top
U3  CASR 15-NP  [CASR_LEM]  166.09 36.58 270 top
U4  CASR 15-NP  [CASR_LEM]  166.19 88.85 270 top
U6  CASR 15-NP  [CASR_LEM]  166.09 140.97 270 top
U13  LMT87LPM  [TO92100]  249.76 26.59 180 bottom
U15  TLV1117LV33DCYR  [SOT223_4]  270.36 175.94 90 top
U17  LMT87QDCKRQ1  [DCK5]  166.29 176.95 0 top
U18  OPA4350UA  [SOIC14]  182.5 169.41 90 top
U19  OPA4350UA  [SOIC14]  212.5 169.28 90 top
U20  OPA340NA/250  [DBV5]  167.13 164.77 270 top
U21  OPA340NA/250  [DBV5]  372.06 199.47 180 top

## Library data of the parts
C1-C3 C8-C13 C22-C25 C31 C32 C39 C47 C51-C60 C63 C69-C72 C83-C88 C90 C120-C122 C127-C130 C133-C135 = CAPACITOR NON-POL: room: pic_pic
C4-C7 C73-C76 = CAPACITOR POL_0: User Part Number: PN; Tolerance: TOL; room: ControlSMPS
C43 C44 C49 = CAP NP: room: control_smps
C567 C603-C605 C635 C710 = CAP NP: room: I_sh_A
C629 C632 = CAP POL: room: I_sh_A
D1 D2 D4 D5 = DIODE ZENER: room: supplyReg_pic
D3 D6-D8 = DIODE: room: lcd_led_pic
D19 = LED: room: lcd_led_pic
J1-J4 J31 J32 = CON2_0
J7 J9 J12 J14-J22 = HEADER 4_0
J8 J26-J28 J35-J37 = CON2: room: InputPowe_smps
J23-J25 = HEADER 8X2_0
J38 = HEADER 4_1
J61-J66 J69 J73 J87 J88 J100 J612 TP145 TP146 = CON2: room: smps
J182 = CON MC4_0: room: I_sh_A
K1-K4 = CON2_3
L1-L6 = INDUCTOR: room: supply_gprs
L9 L10 L14 L21 L23 = VARISTOR_0
L25 L40 = INDUCTOR: room: I_sh_A
PS1 = B0505S-1WR3_0: room: I_sh_A
Q1-Q12 = IMZ120R030M1HXKSA1
Q13 Q14 = CSD18534Q5A
Q15-Q18 = IRF1010E/TO_1
R1-R4 R6 R7 R9 R10 R12-R15 R17 R18 R41 R47 R180-R191 = RESISTOR: User Part Number: PN; Tolerance: TOL; room: pic_pic
R5 = RESISTOR: User Part Number: PN; room: pic_pic
R8 R11 R16 R32 R39 R42-R46 R48-R52 R55 R56 R58 R61 R67-R71 R73-R75 R78-R89 R93-R127 R131-R144 R166 R168-R176 R178 R179 R192-R194 R197-R206 = RESISTOR: room: pic_pic
R59 R60 R66 R76 R208 = RESISTOR: room: control_smps
R793 = RESISTOR: room: I_sh_A
RF1-RF4 = FUSE: Tolerance: ***; User Part Number: ***
T84-T140 T143 T144 T147-T152 T155-T158 T161-T164 T678-T684 = TEST POINT_0: room: microcontroller
TP2-TP15 = TEST POINT
TP119-TP121 TP125-TP127 = TEST POINT: room: microcontroller
U3 = socket8_6: User Part Number: PN; Tolerance: TOL; room: 3
U4 = socket8_7: User Part Number: PN; Tolerance: TOL; room: 3
U6 = socket8_8: User Part Number: PN; Tolerance: TOL; room: 3
U13 = socket8_2: room: 3
U15 = DM3AT-SF-PEJM5_2
U17 = socket8_9: User Part Number: PN; Tolerance: TOL; room: 3
U18 U19 = OPA4340_8
U20 U21 = OPA340_0: User Part Number: PN; Tolerance: TOL

## Footprints (pads in the part's own frame, mm; a bottom-side part is the same pattern mirrored in y, then rotated)
B0505S1WR_REV1
  round 1.65 hole 1.1: 1(0,0) 2(2.54,0) 3(6.35,0) 4(8.89,0)
BOXCAP_37_5MM
  rect 1.778x1.778 hole 1.27: 1(-10,0) 2(27.5,0)
BOXCAPACITOR10MM
  round 3.302 hole 1.473: 1(0,0) 2(0,-10.16)
BOXCAPACITOR15MM
  round 3.302 hole 1.473: 1(0,0) 2(0,-14.986)
CAP400
  round 1.524 hole 0.914: 1(0,0) 2(0,10.16)
CAP_B45_NCH
  round 2.616 hole 2.108: 1(0,0) 2(10,0)
CASR_LEM
  oval 2.54x1.905 hole 1.295: 1(0,0) 2(0,-2.54) 3(0,-5.08) 8(-12.7,-5.08) 9(-12.7,-2.54) 10(-12.7,0)
  oval 1.295x2.311 hole 0.813: 11(-9.207,7.63) 12(-7.303,7.63) 13(-5.397,7.63) 14(-3.493,7.63)
CONN2_HIGHAMP
  oval 10.033x5.334 hole 7.493x2.794: 1(-12.7,0) 2(5.08,0)
CONN_HIGHAMP_REV1
  round 7.62 hole 4.572: 1(0,-2.54)
CYLD200LS125031
  rect 1.321x1.321 hole 0.787: 1(0,0)
  round 1.321 hole 0.787: 2(3.175,0)
DBV5
  rect 1.473x0.559 smd: 1(-1.194,0.95) 2(-1.194,0) 3(-1.194,-0.95) 4(1.194,-0.95) 5(1.194,0.95)
DCK5
  rect 1.168x0.356 smd: 1(-0.965,0.65) 2(-0.965,0) 3(-0.965,-0.65) 4(0.965,-0.65) 5(0.965,0.65)
DO214_REV3
  rect 1.5x1.5 smd: 1(-1.8,0) 2(1.8,0)
DO214AB
  rect 2.2x2.15 smd: 1(-2.2,0) 2(2.2,0)
FUSE600
  round 1.651 hole 1.067: 1(0,0) 2(0,15.24)
JUMPER4MODIFIED
  round 1.524 hole 0.914: 1(0,0) 2(2.54,0) 3(5.08,0) 4(7.62,0)
LED0603
  custom 0.91x0.83 smd: 1(-0.75,0) 2(0.75,0)
NPTC041KFXC-RC_4PIN
  rect 1x2 smd: 1(-1.27,1.321) 2(1.27,-1.981) 3(3.81,1.27) 4(6.35,-1.981)
NPTC082KFMS-RC
  rect 1x2 smd: 1(0,4.445) 2(0,-1.905) 3(2.54,4.445) 4(2.54,-1.905) 5(5.08,4.445) 6(5.08,-1.905) 7(7.62,4.445) 8(7.62,-1.905) 9(10.16,4.445) 10(10.16,-1.905) 11(12.7,4.445) 12(12.7,-1.905) 13(15.24,4.445) 14(15.24,-1.905) 15(17.78,4.445) 16(17.78,-1.905)
PINCONTROLCARD
  rect 2.5x1.05 smd: 1(0,0)
RELAY_T9AS1D12-15_REV1
  round 3.09 hole 2.06: 1(-3.81,12.7)
  round 3.29 hole 2.19: 2(13.97,15.24)
  rect 1.76x1.76 hole 1.17: 3(0,0)
  round 1.76 hole 1.17: 4(10.16,0)
RES0603
  rect 1.1x1 smd: 1(-0.85,0) 2(0.85,0)
RES2010N
  rect 1.206x2.5 smd: 1(-2.253,0) 2(2.253,0)
RES_PSR400IT
  rect 2.946x5.512 smd: 1(-4.039,0) 2(4.039,0)
RES_SQM7_TYCO
  rect 1.524x1.524 hole 1.016: 1(0,0)
  round 1.524 hole 1.016: 2(5.207,0)
SIP_2PIN_BERGSTRIP
  round 2.032 hole 1.016: 1(0,0) 2(0,-2.54)
SIP_2PIN_BERGSTRIP#2
  round 1.524 hole 1.016: 1(0,0) 2(0,-2.54)
SMR0805
  rect 1.27x1.27 smd: 1(0,0) 2(2.134,0)
SNPD0805_MODIFIED
  rect 1.3x1.5 smd: 1(-0.95,0) 2(0.95,0)
SNPD1206_MODIFIED
  rect 1.6x1.8 smd: 1(-1.4,0) 2(1.4,0)
SOIC14
  rect 1.27x0.635 smd: 1(-2.477,3.81) 2(-2.477,2.54) 3(-2.477,1.27) 4(-2.477,0) 5(-2.477,-1.27) 6(-2.477,-2.54) 7(-2.477,-3.81) 8(2.477,-3.81) 9(2.477,-2.54) 10(2.477,-1.27) 11(2.477,0) 12(2.477,1.27) 13(2.477,2.54) 14(2.477,3.81)
SOIC127P1150X280-8N
  custom 1.8x0.6 smd: 1(-5.33,1.905) 2(-5.33,0.635) 3(-5.33,-0.635) 4(-5.33,-1.905) 5(5.33,-1.905) 6(5.33,-0.635) 7(5.33,0.635) 8(5.33,1.905)
SOT223_4
  rect 1.45x0.9 smd: 1(-3.075,2.3) 2(-3.075,0) 3(-3.075,-2.3)
  rect 1.45x3.15 smd: 4(3.075,0)
TESTPOINT
  round 2.032 hole 1.016: 1(0,0)
TO254P1580X500X2522-4
  rect 2.35x2.35 hole 1.63: 1(0,0)
  round 2.35 hole 1.63: 2(5.08,0) 3(7.62,0) 4(10.16,0)
TO92100
  rect 1.397x1.397 hole 0.787: 1(0,0)
  round 1.397 hole 0.787: 2(2.54,0) 3(5.08,0)
TRANS_CSD18534Q5A
  rect 0.75x0.68 smd: 1(-2.77,1.905) 2(-2.77,0.635) 3(-2.77,-0.635) 4(-2.77,-1.905)
  rect 0.66x0.68 smd: 5(2.78,-1.905) 6(2.78,-0.635) 7(2.78,0.635) 8(2.78,1.905)
unnamed
  round 5.588 hole 5.334 unplated: (0,0)
unnamed#2
  round 3.81 hole 2.667: 1(0,0) 2(45.939,0)

## Nets
1.65V_U18: C72.2 R56.2 R78.2 R89.2 R143.1 R179.1
1.65V_U19: C70.2 R104.2 R116.2 R127.2 R140.1 R178.1
3.3V: C44.2 C47.2 C49.1 C53.2 C56.2 C57.2 C58.2 C90.1 C135.1 J23.16 J24.16 J25.16 J38.3 L21.1 L21.2 L23.1 L23.2 R8.2 R11.2 R32.2 R55.1 R139.1 R142.1 R208.2 U13.1(VDD) U15.2 U15.4(OUT2) U17.1 U17.4 U17.5(VDD3) U18.4 U19.4 U20.5 U21.5
3.3VADC: T158.1
3.3VCC: T149.1 T155.1
5V: C43.1 C567.1 J38.1 J69.1 J69.2 J182.8 L9.1 L10.1 L14.1 L25.1 T147.1 T161.1 U15.3
5V_1: C603.1 C604.1 C629.1 J182.1 PS1.4
5VCC1: T163.1
15V: TP2.1
22VPWR1: J23.11 J65.1 J65.2
22VPWR2: J24.11 J62.1 J62.2
+12V: D1.2 D2.2 D4.2 D5.2 J23.15 J24.15 J25.15 J26.1 J28.1 K1.3 K2.3 K3.3 K4.3 TP145.1 TP145.2
+15V: J612.1 J612.2
GND12V: TP146.1 TP146.2
GND15V: J66.1 J66.2
GND22VPWR1: J23.13 J64.1 J64.2
GND22VPWR2: J24.13 J63.1 J63.2
GND_ADC: T156.1 T157.1 T164.1 T682.1
GND_AMC1: C603.2 C604.2 C629.2 J182.4 L40.2 PS1.3
PGND: C1.2 C2.2 C3.2 C4.2 C5.2 C6.1 C7.1 C11.1 C12.1 C13.1 C73.2 C74.2 C75.1 C76.1 C120.2 C121.2 C122.2 C127.1 C128.1 C129.1 C130.1 K4.1 Q4.1 Q8.1 Q12.1 R6.1 R7.1 R9.2 R10.2 R16.1 R17.1 R18.1 R100.2 R112.2 R123.2 R132.2 R184.1 R185.1 R186.2 R187.2 RF4.1 TP4.1 TP5.1 TP6.1 TP7.1 TP8.1 TP9.1 TP10.1 TP11.1 TP12.1 TP13.1 TP14.1 TP15.1
V1.65: R178.2 R179.2
VINV_A: C635.2 J182.3 K1.1 L40.1 R5.1 RF1.1
VINV_B: K2.1 R41.1 RF2.1
VINV_C: K3.1 R47.1 RF3.1
VINV_SEN_A: C59.2 R99.1
VINV_SEN_B: C60.2 R111.1
VINV_SEN_C: C63.2 R122.1
0: C22.2 C23.2 C24.2 C25.2 C31.2 C32.2 C39.1 C43.2 C44.1 C47.1 C49.2 C51.1 C52.1 C53.1 C54.1 C55.1 C56.1 C57.1 C58.1 C59.1 C60.1 C63.1 C69.1 C70.1 C71.1 C72.1 C90.2 C130.2 C134.1 C135.2 C567.2 C605.2 C632.2 C710.2 D19.1(CATHODE) J8.1 J8.2 J23.1 J23.2 J24.1 J24.2 J25.1 J25.2 J27.1 J37.1 J37.2 J38.4 J88.1 J88.2 J182.5 PS1.1 Q13.1 Q13.2 Q13.3 Q14.1 Q14.2 Q14.3 Q15.3(S) Q16.3(S) Q17.3(S) Q18.3(S) R60.2 R76.2 R141.2 R144.2 R201.1 R202.1 R203.1 R204.1 R206.2 T148.1 T150.1 T151.1 T152.1 TP3.1 U3.13 U4.13 U6.13 U13.3 U15.1 U17.2 U18.11 U19.11 U20.2 U21.2
ADC_A0: T97.1
ADC_A1: T98.1
ADC_A2: T99.1
ADC_A3: T100.1
ADC_A4: T101.1
ADC_A5: T102.1
ADC_A6: T103.1
ADC_A8: T104.1
ADC_A9: T105.1
ADC_B0: T106.1
ADC_B1: T107.1
ADC_B2: T108.1
ADC_B3: T109.1
ADC_B4: T110.1
ADC_C0: T111.1
ADC_C1: T112.1
ADC_C2: T113.1
ADC_C4: T114.1
ADC_C14: T115.1
D4: R197.2 T137.1
D5: R198.2 T138.1
D6: R199.2 T139.1
D7: R200.2 T140.1
DC+: C1.1 C2.1 C3.1 C4.1 C5.1 C73.1 C74.1 C120.1 C121.1 C122.1 J1.1 J15.4 J16.4 J17.4 J36.1 J36.2 Q1.1 Q5.1 Q9.1 R1.2 R2.2 R137.2 R180.2 R181.2
DC-: C6.2 C7.2 C11.2 C12.2 C13.2 C75.2 C76.2 C127.2 C128.2 C129.2 J2.1 J35.1 J35.2 Q2.2 Q6.2 Q10.2 R14.1 R15.1 R190.1 R191.1
DIS1PWM: J23.8 J24.8 J25.8 T132.1
DIS2PWM: T133.1
ECAP3: T134.1
EN: T136.1
EPWM1A: J23.5 T116.1
EPWM1B: J23.4 T117.1
EPWM2A: J23.6 T118.1
EPWM2B: J23.3 T119.1
EPWM3A: J24.5 T120.1
EPWM3B: J24.4 T121.1
EPWM4A: J24.6 T122.1
EPWM4B: J24.3 T123.1
EPWM5A: J25.5 T124.1
EPWM5B: J25.4 T125.1
EPWM6A: J25.6 T126.1
EPWM6B: J25.3 T127.1
EPWM7A: T128.1
EPWM7B: T129.1
EPWM8A: R59.1 R66.1 T130.1
EPWM8B: T131.1
EXTSWT: T162.1
FAN1: J25.11 J73.1 J73.2
FAN2: J25.13 J100.1 J100.2
FLT_A: J23.10 R32.1
FLT_B: J24.10 R8.1
FLT_C: J25.10 R11.1
I1P: C635.1 J182.2 R793.1
IGRID_A: L2.2 R5.2 R793.2
IGRID_B: L4.2 R41.2
IGRID_C: L6.2 R47.2
IIND_A: Q1.2 Q2.1 Q3.1 U3.1 U3.2 U3.3
IIND_A_RTN: L1.1 U3.8 U3.9 U3.10
IIND_B: Q5.2 Q6.1 Q7.1 U4.1 U4.2 U4.3
IIND_B_RTN: L3.1 U4.8 U4.9 U4.10
IIND_C: Q9.2 Q10.1 Q11.1 U6.1 U6.2 U6.3
IIND_C_RTN: L5.1 U6.8 U6.9 U6.10
LCD_LIGHT: T681.1
NEU: J32.1 K4.2 R48.2 R85.2 R110.2 RF4.2
NTR: J87.1 J87.2
OPAMP_A1+: J182.7 T87.1
OPAMP_A1-: J182.6 T95.1
OPAMP_A2+: T679.1 U3.12
OPAMP_A2-: T84.1 U3.11(VREF)
OPAMP_A4+: T680.1 U4.12
OPAMP_A4-: T678.1 U4.11(VREF)
OPAMP_A6+: T85.1 U6.12
OPAMP_A6-: T93.1 U6.11(VREF)
OPAMP_B2+: T96.1
OPAMP_B2-: T88.1
OPAMP_B4+: T94.1
OPAMP_B4-: T86.1
OPAMP_C2+: C39.2 R52.1 R58.1 T89.1
OPAMP_C2-: T91.1
OPAMP_C3+: C52.2 R93.1 T92.1
OPAMP_C3-: T90.1
PA_N: C83.1 R39.2 R45.1 U18.2
PA_P: R51.1 R56.1 U18.3
PB_N: C85.1 R61.2 R70.1 U18.6
PB_P: R75.1 R78.1 U18.5
PC_N: C87.1 R79.2 R83.1 U18.9
PC_P: R88.1 R89.1 U18.10
PD_N: C133.1 R131.2 R135.1 U18.13
PD_P: R205.1 R206.1 U18.12
PGA1_GND: TP125.1
PGA1_IN: TP121.1
PGA3_GND: TP126.1
PGA3_IN: TP120.1
PGA5_GND: TP127.1
PGA5_IN: TP119.1
PH_A: J3.1 K1.2 R42.2 RF1.2
PH_B: J4.1 K2.2 R67.2 RF2.2
PH_C: J31.1 K3.2 R80.2 RF3.2
Q1A: J17.1 Q1.4 R168.2
Q1A_N: J17.2 J20.4 Q1.3(SENSE) R168.1
Q1B: J15.1 Q5.4 R169.2
Q1B_N: J9.4 J15.2 Q5.3(SENSE) R169.1
Q1C: J16.1 Q9.4 R170.2
Q1C_N: J12.4 J16.2 Q9.3(SENSE) R170.1
Q2A: J20.1 Q2.4 R192.2
Q2A_N: J20.2 Q2.3(SENSE) R192.1
Q2B: J9.1 Q6.4 R193.2
Q2B_N: J9.2 Q6.3(SENSE) R193.1
Q2C: J12.1 Q10.4 R194.2
Q2C_N: J12.2 Q10.3(SENSE) R194.1
Q3A: J14.1 Q3.4 R172.1
Q3B: J18.1 Q7.4 R174.1
Q3C: J19.1 Q11.4 R176.1
Q4A: J7.1 Q4.4 R171.1
Q4B: J21.1 Q8.4 R173.1
Q4C: J22.1 Q12.4 R175.1
QA_N: J7.2 J14.2 R171.2 R172.2
QB_N: J18.2 J21.2 Q7.3(SENSE) Q8.3(SENSE) R173.2 R174.2
QC_N: J19.2 J22.2 Q11.3(SENSE) Q12.3(SENSE) R175.2 R176.2
RDY: J23.12 J24.12 J25.12
RS: T135.1
RST: J23.14 J24.14 J25.14
SCIB_RX: T684.1
SCIB_TX: T683.1
SCL_A: T144.1
SDA_A: T143.1
SMPS-P: J61.1 J61.2
VA_N: C84.1 R94.2 R98.1 U19.2
VA_P: R103.1 R104.1 U19.3
VB_N: C86.1 R105.2 R109.1 U19.6
VB_P: R115.1 R116.1 U19.5
VC_N: C88.1 R117.2 R121.1 U19.9
VC_P: R126.1 R127.1 U19.10
VDC_SEN: J38.2
VG_SEN_A: C51.2 R46.1
VG_SEN_B: C54.2 R71.1
VG_SEN_C: C55.2 R84.1
VMID_SEN_T: C134.2 R136.1
VSEN_A: C8.1 L1.2 L2.1 R95.2
VSEN_B: C9.1 L3.2 L4.1 R106.2
VSEN_C: C10.1 L5.2 L6.1 R118.2
N13930831: Q3.2 Q4.2
N13931486: Q7.2 Q8.2
N13931754: Q11.2 Q12.2
N13935824: C8.2 R16.2
N13935828: C9.2 R17.2
N13935832: C10.2 R18.2
N13938639: D3.2 K1.4 Q15.2 Q15.4
N13938962: Q15.1 R197.1 R201.2
N13942026: D6.2 K2.4 Q16.2 Q16.4
N13942078: Q16.1 R198.1 R204.2
N13942443: D7.2 K3.4 Q17.2 Q17.4
N13942499: Q17.1 R199.1 R202.2
N13942871: D8.2 K4.4 Q18.2 Q18.4
N13942927: Q18.1 R200.1 R203.2
N13952073: C22.1 C23.1 L9.2 U3.14
N13956128: C24.1 C25.1 L10.2 U4.14
N13957373: C31.1 C32.1 L14.2 U6.14
N13962517: R95.1 R96.2
N13962521: R96.1 R97.2
N13962525: R97.1 R98.2
N13962529: R100.1 R101.2
N13962533: R101.1 R102.2
N13962537: R102.1 R103.2
N13962920: C84.2 R94.1 R99.2 U19.1
N13966303: R106.1 R107.2
N13966307: R107.1 R108.2
N13966311: R108.1 R109.2
N13966315: R112.1 R113.2
N13966319: R113.1 R114.2
N13966323: R114.1 R115.2
N13966367: C86.2 R105.1 R111.2 U19.7
N13967295: R118.1 R119.2
N13967299: R119.1 R120.2
N13967303: R120.1 R121.2
N13967307: R123.1 R124.2
N13967311: R124.1 R125.2
N13967315: R125.1 R126.2
N13967359: C88.2 R117.1 R122.2 U19.8
N13968711: R140.2 U19.13 U19.14(OUT)
N13968894: C69.2 R139.2 R141.1 U19.12
N13971097: R80.1 R81.2
N13971101: R81.1 R82.2
N13971105: R82.1 R83.2
N13971109: R85.1 R86.2
N13971113: R86.1 R87.2
N13971117: R87.1 R88.2
N13971145: C87.2 R79.1 R84.2 U18.8
N13971857: R42.1 R43.2
N13971861: R43.1 R44.2
N13971865: R44.1 R45.2
N13971869: R48.1 R49.2
N13971873: R49.1 R50.2
N13971877: R50.1 R51.2
N13971921: C83.2 R39.1 R46.2 U18.1
N13972313: R67.1 R68.2
N13972317: R68.1 R69.2
N13972321: R69.1 R70.2
N13972325: R73.2 R110.1
N13972329: R73.1 R74.2
N13972333: R74.1 R75.2
N13972361: C85.2 R61.1 R71.2 U18.7
N14375392: D4.1(CATHODE) D7.1(K)
N14612483: R143.2 U20.1(OUT) U20.4
N14612495: C71.2 R142.2 R144.1 U20.3
N14613330: C133.2 R131.1 R136.2 U18.14(OUT)
N14613438: R132.1 R133.2
N14613442: R133.1 R134.2
N14613446: R134.1 R135.2
N14613580: R137.1 R138.2
N14613584: R138.1 R166.2
N14613588: R166.1 R205.2
N14739396: C605.1 C632.1 C710.1 L25.2 PS1.2(VIN)
N14761149: D19.2 R208.1
N14762846: R52.2 U13.2
N14762934: J27.2 R55.2 R58.2
N14763052: R93.2 U17.3
N14767744: J26.2 Q13.5 Q13.6 Q13.7 Q13.8
N14767820: Q13.4 R59.2 R60.1
N14767910: J28.2 Q14.5 Q14.6 Q14.7 Q14.8
N14767982: Q14.4 R66.2 R76.1
N14782539: U21.4
N14782555: U21.1(OUT)
N14782847: U21.3
N146736940: R189.1 R191.2
N146736941: R187.1 R189.2
N146738420: R10.1 R13.2
N146738621: D2.1(CATHODE) D6.1(K)
N146740741: R12.1 R14.2
N146741380: R2.1 R4.2
N146742660: R186.1 R188.2
N146743860: R3.1 R6.2
N146743861: R1.1 R3.2
N146746781: R13.1 R15.2
N146749821: D1.1(CATHODE) D3.1(K)
N146750020: R4.1 R7.2
N146751820: R180.1 R182.2
N146752301: D5.1(CATHODE) D8.1(K)
N146752501: R188.1 R190.2
N146753061: R9.1 R12.2
N146754380: R182.1 R184.2
N146758060: R181.1 R183.2
N146758980: R183.1 R185.2

Pads without a net: J7 3 4; J9 3; J12 3; J14 3 4; J15 3; J16 3; J17 3; J18 3 4; J19 3 4; J20 3; J21 3 4; J22 3 4; J23 7 9; J24 7 9; J25 7 9; J* 1 2; J*#2 1 2; J*#3 1 2; J*#4 1 2; J*#5 1 2; J*#6 1 2; Q3 3; Q4 3

## Via types
v1: diameter 0.889, hole 0.508, TOP to BOTTOM, 225 vias
v2: diameter 1.524, hole 1.016, TOP to BOTTOM, 39 vias
v3: diameter 0.61, hole 0.33, TOP to BOTTOM, 1 via
v4: diameter 2.54, hole 2.032, TOP to BOTTOM, 24 vias

## Routing (per net, layer and track width the routed paths; a pad name or vN(x,y) marks a point on that pad's centre or on a via; arc(x,y) is an arc through that point)
1.65V_U18: length 60.6
  TOP w0.254: R56.2 183.3,162.59 183.32,162.62 R78.2
  TOP w0.508: R143.1 C72.2 R179.1 171.92,162.38 v1(171.92,160.35) 172.61,160.35 172.63,160.32 174.45,160.32 175.07,160.95 176.08,160.95 177.14,159.89 183.67,159.89 184.33,160.55 R78.2 ; R89.2 183.26,178.49 179.5,182.25 178.03,182.25 178,182.22 176.48,182.22 v1(176.38,182.12)
  BOTTOM w0.508: v1(176.38,182.12) 176.38,175.49 178.54,173.33 178.54,165.2 175.84,162.51 173,162.51 172.01,161.52 172.01,161.12 171.92,161.03 v1(171.92,160.35)
1.65V_U19: length 72.2
  TOP w0.254: 214.33,161.59 214.3,161.56 214.3,161.36 ; R127.2 213.26,177.71 213.18,177.79 v1(213.18,178.61) ; R104.2 213.3,162.46 213.32,162.49 R116.2
  TOP w0.381: v1(213.18,178.61) 211.71,180.09 210.11,180.09 208.23,181.97 v1(205.36,181.97) ; C70.2 v1(206.3,177.65)
  TOP w0.508: C70.2 R140.1 ; v1(218.13,170.61) 223.55,165.2 223.55,160.71 222.3,159.46 215.37,159.46 214.35,160.48 R178.1 214.3,161.36 214.33,161.38 R116.2
  BOTTOM w0.381: 191.31,181.97 v1(205.36,181.97)
  BOTTOM w0.508: v1(218.13,170.61) 213.18,175.56 v1(213.18,178.61) 207.26,178.61 v1(206.3,177.65)
3.3V: length 299.1
  TOP w0.381: C135.1 168.9,161.29 168.91,161.28 v1(169.13,161.28) ; R142.1 164.08,166.31 v1(164.07,166.3) ; v1(177.5,167.39) 177.44,167.39 177.06,167.77 C56.2
  TOP w0.508: v1(247.8,29.39) 247.8,31.66 247.7,31.76 R55.1 ; v1(248.54,81.31) 248.54,82.13 248.64,82.23 248.64,83.16 ; R139.1 211.38,178.34 210.31,179.4 203.61,179.4 201.6,177.39 201.6,169.57 202.74,168.43 203.45,168.43 L23.2 ; C135.1 168.08,161.34 U20.5
  TOP w0.762: U13.1 249.76,25.39 249.78,25.36 C90.1 ; v2(267,70.21) J24.16 ; v2(267,17.98) J23.16 ; J25.16 v2(267,122.45)
  PWR LAYER w0.381: v1(164.07,166.3) 164.51,165.86 164.52,165.86 164.52,165.85 164.55,165.85 v1(169.13,161.28)
  PWR LAYER w1.27: v1(272.92,123.77) 272.92,120.07 270.54,117.68 v1(270.54,71.1) 270.54,40.77 266.19,36.42 v1(266.19,27.15)
  BOTTOM w0.381: v1(169.13,161.28) 169.13,165.49 171.02,167.39 v1(177.5,167.39)
  BOTTOM w0.508: v1(247.8,29.39) 247.8,28.55 U13.1 251.74,24.61 258.9,24.61 261.44,27.15 v1(266.19,27.15) 270.81,22.53 270.81,21.11 ; 270.81,21.11 268.63,21.11 266.7,23.04 R32.2 ; 270.81,21.11 270.81,18.82 269.98,17.98 v2(267,17.98) ; v1(248.54,81.31) 248.54,80.06 249.76,78.84
  BOTTOM w0.762: 270.54,74.37 268.1,74.37 267.21,75.26 R8.2 ; 270.54,74.37 v1(270.54,71.1) 269.65,70.21 v2(267,70.21) ; 270.54,74.37 270.54,76.68 268.38,78.84 249.76,78.84 ; R11.2 266.98,127.48 267.66,126.8 272.92,126.8 ; 249.78,131.88 255.17,131.88 256.54,133.25 271.3,133.25 272.97,131.57 272.97,126.85 272.92,126.8 ; v2(267,122.45) 271.6,122.45 v1(272.92,123.77) 272.92,126.8
5V: length 523.9
  TOP w0.508: 179.72,152.12 180.24,152.12 v1(181.13,153.01) ; J182.8 55.85,15.12 56.25,15.52 L25.1 58.03,15.2 C567.1 58.03,12.08 58.6,11.51 78.82,11.51 84.15,16.84 v1(85.07,16.84) ; v1(182.25,153.01) 182.25,152.16 180.64,150.55 179.71,150.55 ; 277.62,165.8 277.62,167.49 ; 277.34,165.96 275.01,165.96 274.98,165.94 273.23,165.94
  TOP w0.762: v1(105.26,81.64) 104.31,81.64 104.28,81.61 103.15,81.61 ; 103.25,145.11 105.23,145.11 v1(105.28,145.16) ; 273.23,167.87 273.23,165.94
  TOP w1.27: v1(126.72,86.36) v1(133.07,92.71) ; J38.1 293.93,160.25 293.93,164.8 290.53,168.2 290.53,171.58
  PWR LAYER w0.762: v1(126.72,64.72) v1(126.72,42.16) 126.72,21.29 122.28,16.84 v1(85.07,16.84) ; v1(183.57,41.71) 183.57,38.46 182.55,37.44 170.79,37.44 166.07,42.16 v1(130.28,42.16) ; v1(135.03,148.51) 166.83,148.51 173.13,154.81 184.63,154.81 188.98,150.47
  PWR LAYER w1.27: v1(133.07,92.71) 150.39,92.71 151.71,94.03 168.73,94.03 172.49,90.27 181.61,90.27 183.57,92.23 v1(183.57,95.2)
  BOTTOM w0.381: 191.11,162.94 182.25,154.08 v1(182.25,153.01) ; 190.86,163.5 181.13,153.77 v1(181.13,153.01)
  BOTTOM w0.762: v1(126.72,42.16) v1(130.28,42.16) ; 126.72,81.64 v1(105.26,81.64) ; 126.72,81.64 v1(126.72,64.72) ; 126.72,81.64 v1(126.72,86.36) 126.72,130.76 125.36,132.12 125.36,145.16 ; 125.36,145.16 v1(105.28,145.16) ; 125.36,145.16 131.67,145.16 v1(135.03,148.51)
  BOTTOM w1.27: v1(275.01,167.97) v1(275.01,169.62) v1(275.01,171.27) v1(275.01,180.37) 274.98,180.37 v1(273.84,181.51) v1(272.67,182.68)
  vias: v1(183.57,147.9) v1(183.57,146.63) v1(183.57,42.98) v1(277.01,171.27) v1(277.01,169.62) v1(277.01,167.97)
5V_1: length 16.9
  TOP w0.508: J182.1 56.52,25.78 56.58,25.84 C603.1 58.87,25.84 58.94,25.92 C604.1 65.46,25.92 65.75,25.63 PS1.4 70.49,25.63 70.77,25.91 C629.1
22VPWR2: length 108.4
  TOP w0.762: J24.11 v2(261.92,72.75)
  PWR LAYER w0.254: v2(261.92,20.52) 260.71,21.74 260.71,71.53 v2(261.92,72.75) 261.92,118.36 260.71,119.58 260.71,123.77 v2(261.92,124.99)
+12V: length 618
  TOP w0.762: v2(267,20.52) J23.15 ; v1(274.83,126.52) 273.88,126.52 273.49,126.9 J25.15
  TOP w1.27: J24.15 269.39,74.65 v1(272.92,71.12) ; D2.2 36.07,128.51 36.17,128.41 K2.3 ; K4.3 36.04,31.61 36.09,31.66 D5.2 ; D4.2 36.07,178.58 36.04,178.55 K3.3 ; D1.2 36.24,79.06 36.04,78.86 K1.3
  PWR LAYER w1.27: v1(36.04,141) v1(36.04,142.8) v1(36.04,144.6) 31.93,148.72 31.93,172.75 36.07,176.89 ; 231.34,188.11 144.04,188.11 139.17,192.99 52.17,192.99 36.07,176.89 ; v2(267,20.52) 268.35,21.87 268.35,34.9 272.92,39.47 v1(272.92,71.12) 272.92,117.27 274.83,119.18 v1(274.83,126.52) 274.83,147.42 288.21,160.81 288.21,164.87 289.81,166.47 J28.1 ; K1.3 32.08,67.21 32.08,33.93 K4.3 ; 36.07,176.89 K3.3 ; K2.3 28.42,112.88 ; 310.64,165 310.63,165.01
  PWR LAYER w1.524: 28.42,112.88 v1(28.42,90.55) v1(28.42,88.75) v1(28.42,86.94)
  BOTTOM w0.762: 323.54,162.94 323.76,163.17 331.34,163.17 333.73,165.56 333.73,166.57 341.78,174.63
  BOTTOM w1.27: K1.3 36.04,75.13 28.42,82.75 v1(28.42,86.94) ; v1(36.04,141) 36.04,122.39 36.17,122.27 K2.3
  vias: v1(317.7,162.97) v1(317.7,161.32) v1(319.35,162.97) v1(319.35,161.32) v1(321.01,162.97) v1(321.01,161.32) v1(322.66,162.97) v1(322.66,161.32) v1(324.31,162.97) v1(324.31,161.32)
GND22VPWR1: length 108.4
  TOP w0.762: v2(264.46,20.52) J23.13
  PWR LAYER w0.254: v2(264.46,124.99) 263.27,123.8 263.27,119.91 264.46,118.72 v2(264.46,72.75) 263.17,71.45 263.17,24.31 264.46,23.01 v2(264.46,20.52)
GND_AMC1: length 26.5
  TOP w0.508: J182.4 51.36,24.54 51.87,24.03 57.62,24.03 C603.2 58.87,23.94 58.94,24.02 C604.2 66.03,24.02 PS1.3 70.41,23.09 70.77,22.73 C629.2
  TOP w0.762: L40.2 49.51,26.54 50.27,25.78 J182.4
PGND: length 2003.1
  TOP w0.254: v1(246.61,66.04) 246.61,70.49 247.62,71.5 247.62,75.26 248.77,76.4 252.91,76.4 254.99,78.49 254.99,80.67 ; v1(245.72,118.62) 247.12,120.02 247.12,126.65 248.86,128.4 250.6,128.4 255.04,132.84 255.04,132.89
  TOP w0.508: 247.7,137.08 v1(246.43,137.08) ; 253.36,134.49 253.36,132.87 253.39,132.89 255.04,132.89 ; 253.36,80.65 253.39,80.67 254.99,80.67
  TOP w0.762: 194.44,68.35 v1(194.44,69.7) ; v1(55.02,52.32) R100.2 ; 253.36,82.19 253.36,80.65 ; R112.2 v1(54.71,115.04)
  TOP w1.27: v1(55.85,175.08) R123.2
  PWR LAYER w0.254: v1(174.98,141.22) 172.11,141.22 169.32,144.02 v1(146.53,144.02) ; v1(175.92,53.59) 182.5,60.17 245.36,60.17 246.61,61.42 v1(246.61,66.04) ; v1(147.29,144.78) 169.37,144.78 171.91,142.24 v1(174.98,142.24) ; v1(147.29,145.8) 169.11,145.8 172.11,142.8 174.46,142.8 174.66,143 175.44,143 177.29,141.15 178.71,141.15 v1(180.06,142.49) ; v1(179.04,142.49) 178.13,141.58 177.6,141.58 175.67,143.51 174.45,143.51 174.25,143.31 172.36,143.31 169.11,146.56 v1(146.53,146.56)
  PWR LAYER w0.381: v1(245.72,118.62) 242.52,115.42 182.5,115.42 177.55,120.37 177.55,126.47 v1(172.19,131.83) ; v1(28.17,74.96) 45.9,74.96 46.99,73.86 v1(47.75,73.86)
  PWR LAYER w0.508: v1(246.43,137.08) 249.78,133.73 249.78,131.88
  BOTTOM w0.254: v1(172.19,131.83) 171.53,132.49 171.53,157.63 166.83,162.33 166.83,174.68 177.24,185.09 ; v1(48.72,6.6) 33.3,6.6 30.48,9.42 30.48,76.43 24.99,81.92 24.99,96.09 30.33,101.42 30.33,176.23 34.16,180.06 34.16,189.97 41.78,197.59 ; 170.81,103.67 170.81,105.66 169.82,106.66 152.02,106.66 134.49,124.18 134.49,138.91 140.36,144.78 v1(147.29,144.78) ; 37.72,198.48 27.36,188.11 27.36,176.48 26.7,175.82 26.7,121.97 27.74,120.93 27.74,101.12 23.5,96.88 23.5,81.15 28.17,76.48 v1(28.17,74.96) ; 176.83,185.32 166.37,174.85 166.37,162.1 171.09,157.38 171.09,117.32 174.62,113.79 174.62,101.83 176,100.46 176,89.18 171.5,84.68 171.5,66.68 175.92,62.26 v1(175.92,53.59) ; 39.88,198.1 32.38,190.6 32.38,180.14 28.93,176.68 28.93,138.1 v1(28.3,137.47) ; 43.94,197.08 35.56,188.7 35.56,179.5 31.72,175.67 v1(31.72,138.18) ; v1(146.53,144.02) 140.32,144.02 135,138.7 135,124.39 152.23,107.16 169.93,107.16 172.44,104.65 172.44,103.66
  BOTTOM w0.381: v1(174.98,141.22) 176.12,141.22 178.54,143.64 178.54,163.07 183.46,168 222.66,168 223.75,169.09 ; v1(179.04,142.49) 179.04,156.67 189.69,167.31 224.1,167.31 ; 31.9,64.67 31.9,77.32 26.47,82.75 26.47,95.66 31.72,100.91 v1(31.72,138.18) ; 31.9,64.67 31.9,10.87 34.42,8.36 48.57,8.36 ; 31.9,64.67 32.05,64.52 ; v1(174.98,142.24) 176.25,142.24 178.03,144.02 178.03,163.3 183.27,168.54 222.09,168.54 223.75,170.21 ; 172.69,51.47 172.69,52.34 170.75,54.28 137.97,54.28 131.95,60.3 131.95,137.14 140.61,145.8 v1(147.29,145.8) ; v1(180.06,142.49) 180.06,156.79 190.04,166.78 224.38,166.78 ; 171.08,51.47 171.08,52.34 169.75,53.67 137.86,53.67 131.19,60.34 131.19,137.09 140.66,146.56 v1(146.53,146.56)
  BOTTOM w0.762: C74.2 344.91,67.18 348.65,70.93 348.65,75.88
  BOTTOM w1.27: 303.07,131.93 C7.1 ; 303.07,131.93 304.78,130.22 R9.2 ; 303.07,131.93 304.78,133.64 R10.2 ; 343.23,34.8 346.11,37.68 R184.1 ; 343.23,34.8 C5.2 ; 343.23,34.8 343.36,34.8 346.19,31.97 R185.1 ; C4.2 343.51,131.93 ; 343.51,131.93 346.11,134.53 R6.1 ; 343.51,131.93 346.19,129.25 R7.1 ; 303.33,34.8 304.78,36.26 R186.2 ; 303.33,34.8 C6.1 ; 303.33,34.8 304.78,33.34 R187.2
V1.65: length 137.1
  TOP w0.254: v1(212.7,159.03) 212.6,159.13 R178.2
  TOP w0.508: R179.2 170.04,160.72 171.83,158.93 185.16,158.93 186.05,159.82 189.74,159.82 190.17,160.25 v1(190.86,160.25)
  PWR LAYER w0.508: v1(212.7,159.03) 215.57,156.16 255.32,156.16 272.24,173.08 281.56,173.08 283.11,171.53 283.11,164.03
  BOTTOM w0.508: v1(190.86,160.25) 190.86,161.75 191.47,162.36 202.18,162.36 205.51,159.03 v1(212.7,159.03)
VINV_A: length 18.8
  TOP w0.508: L40.1 49.51,31.64 49.28,31.87 R5.1
  TOP w0.762: J182.3 52.63,27.88 C635.2 52.43,28.31 52.43,35.31 51.67,36.07 R5.1
  vias: v1(46.74,40.11) v1(46.76,38.15) v1(46.76,36.22) v1(46.79,34.29)
VINV_B: length 12.4
  TOP w0.508: 49.3,95.93 49.3,96.62 49.28,96.64 R41.1
  TOP w0.762: 52.55,95.88 52.55,99.54 51.26,100.84 R41.1
  vias: v1(46.79,103.1) v1(46.79,101.9) v1(46.79,100.61) v1(46.79,99.06)
VINV_C: length 12.3
  TOP w0.381: 52.55,159.38 52.55,163.08 51.3,164.34 R47.1
  TOP w0.508: v1(49.3,159.43) 49.3,161 49.5,161.2 R47.1
  vias: v1(47.06,166.76) v1(47.06,165.11) v1(47.06,163.46) v1(47.06,161.81)
